# Altium PCB Voltage_Current.PcbDoc
Units mil, origin at the board's own origin, x right, y up, seen from the top; angles counter-clockwise.
Board outline 3475 x 2550 mil, 2 copper layers (Top Layer, Bottom Layer); 54 components, 46 nets, 228 pads, 37 vias.
Unrouted connection lines stored in the file: 2.
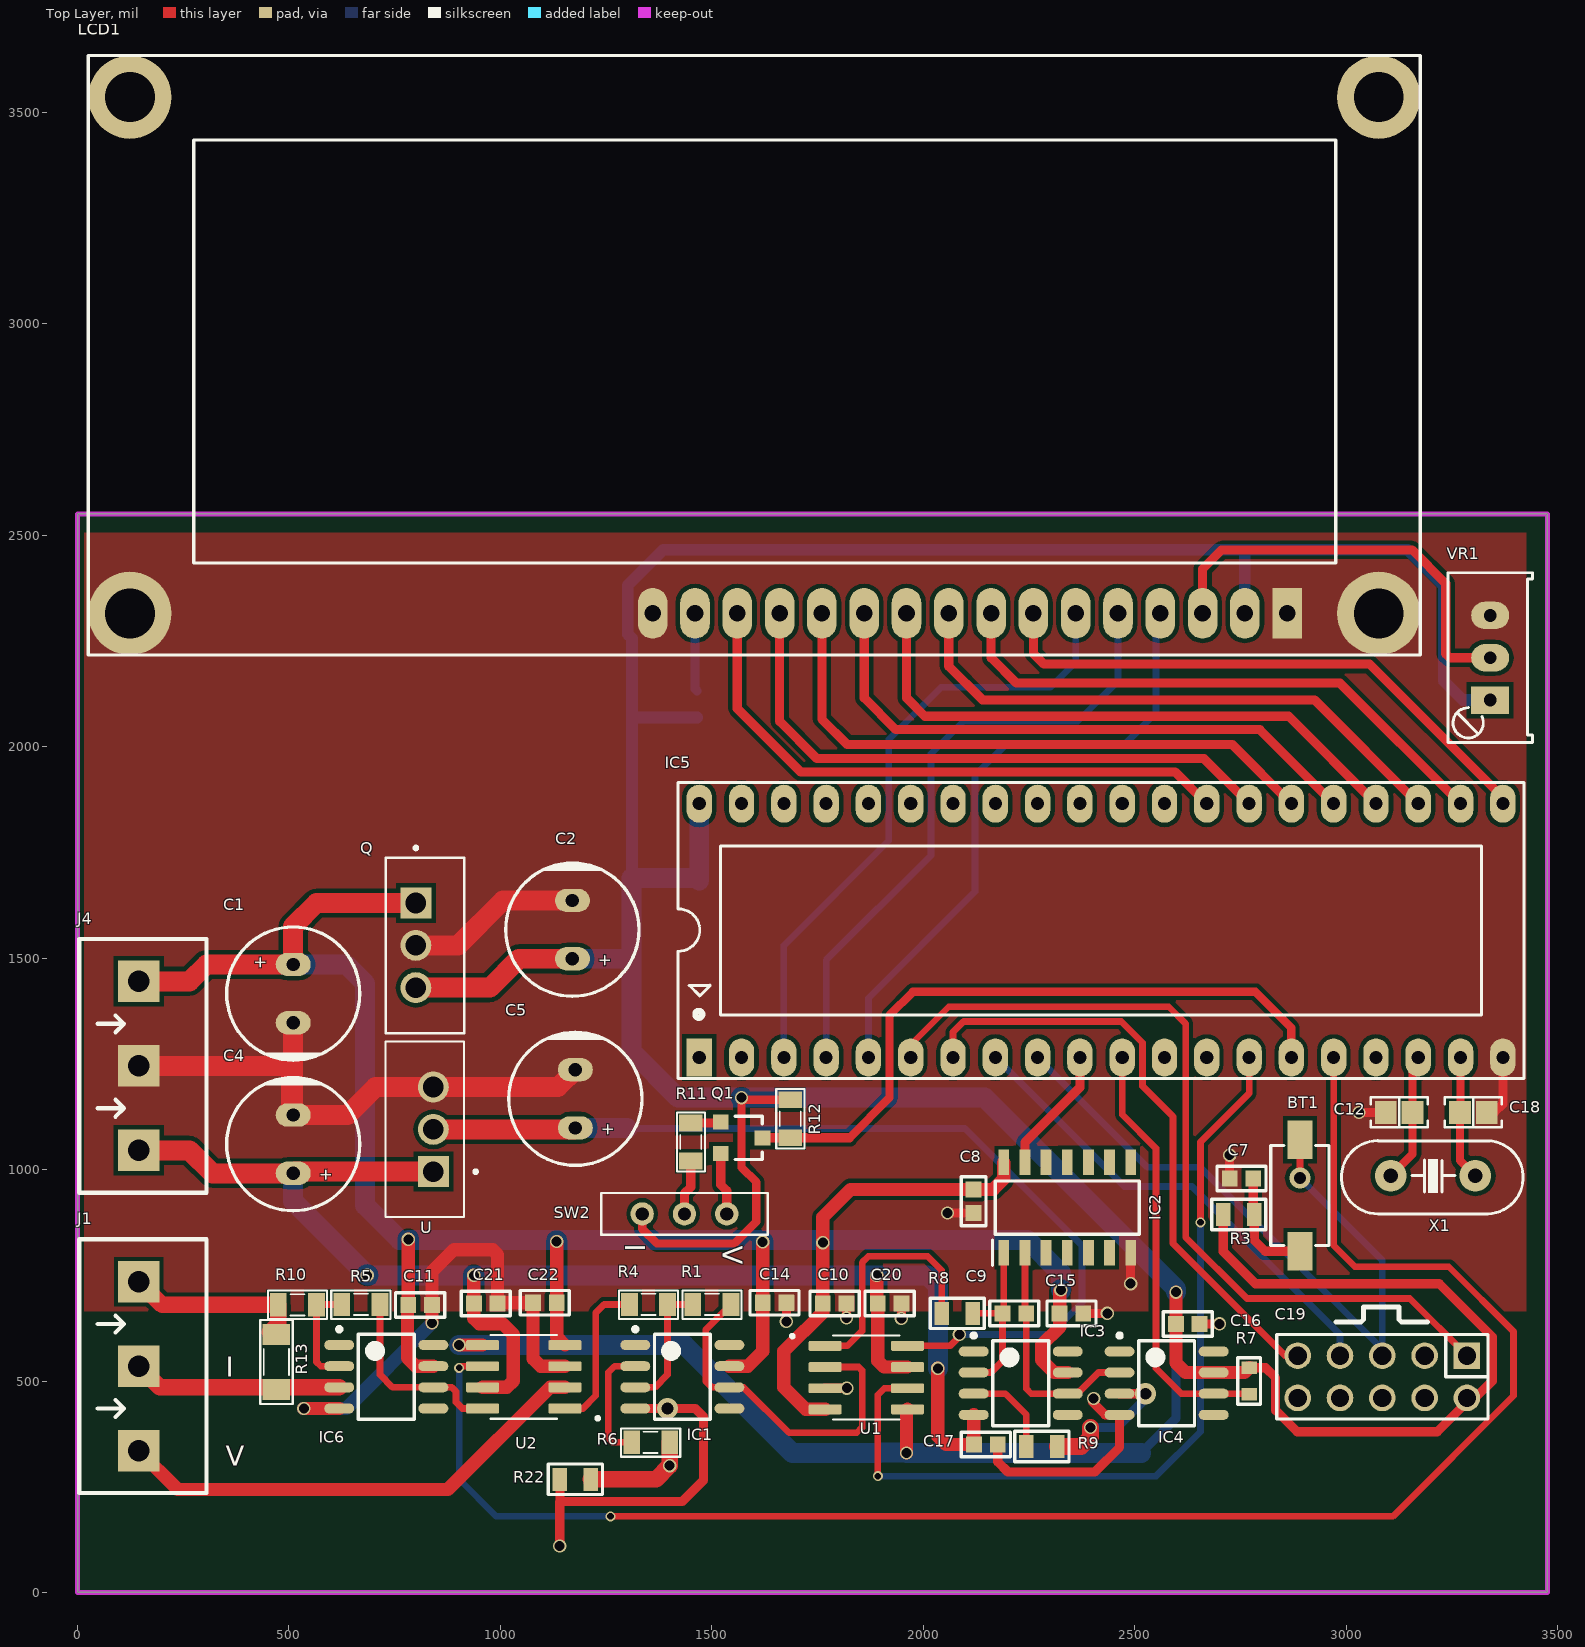
[diagram p0: Top Layer view]
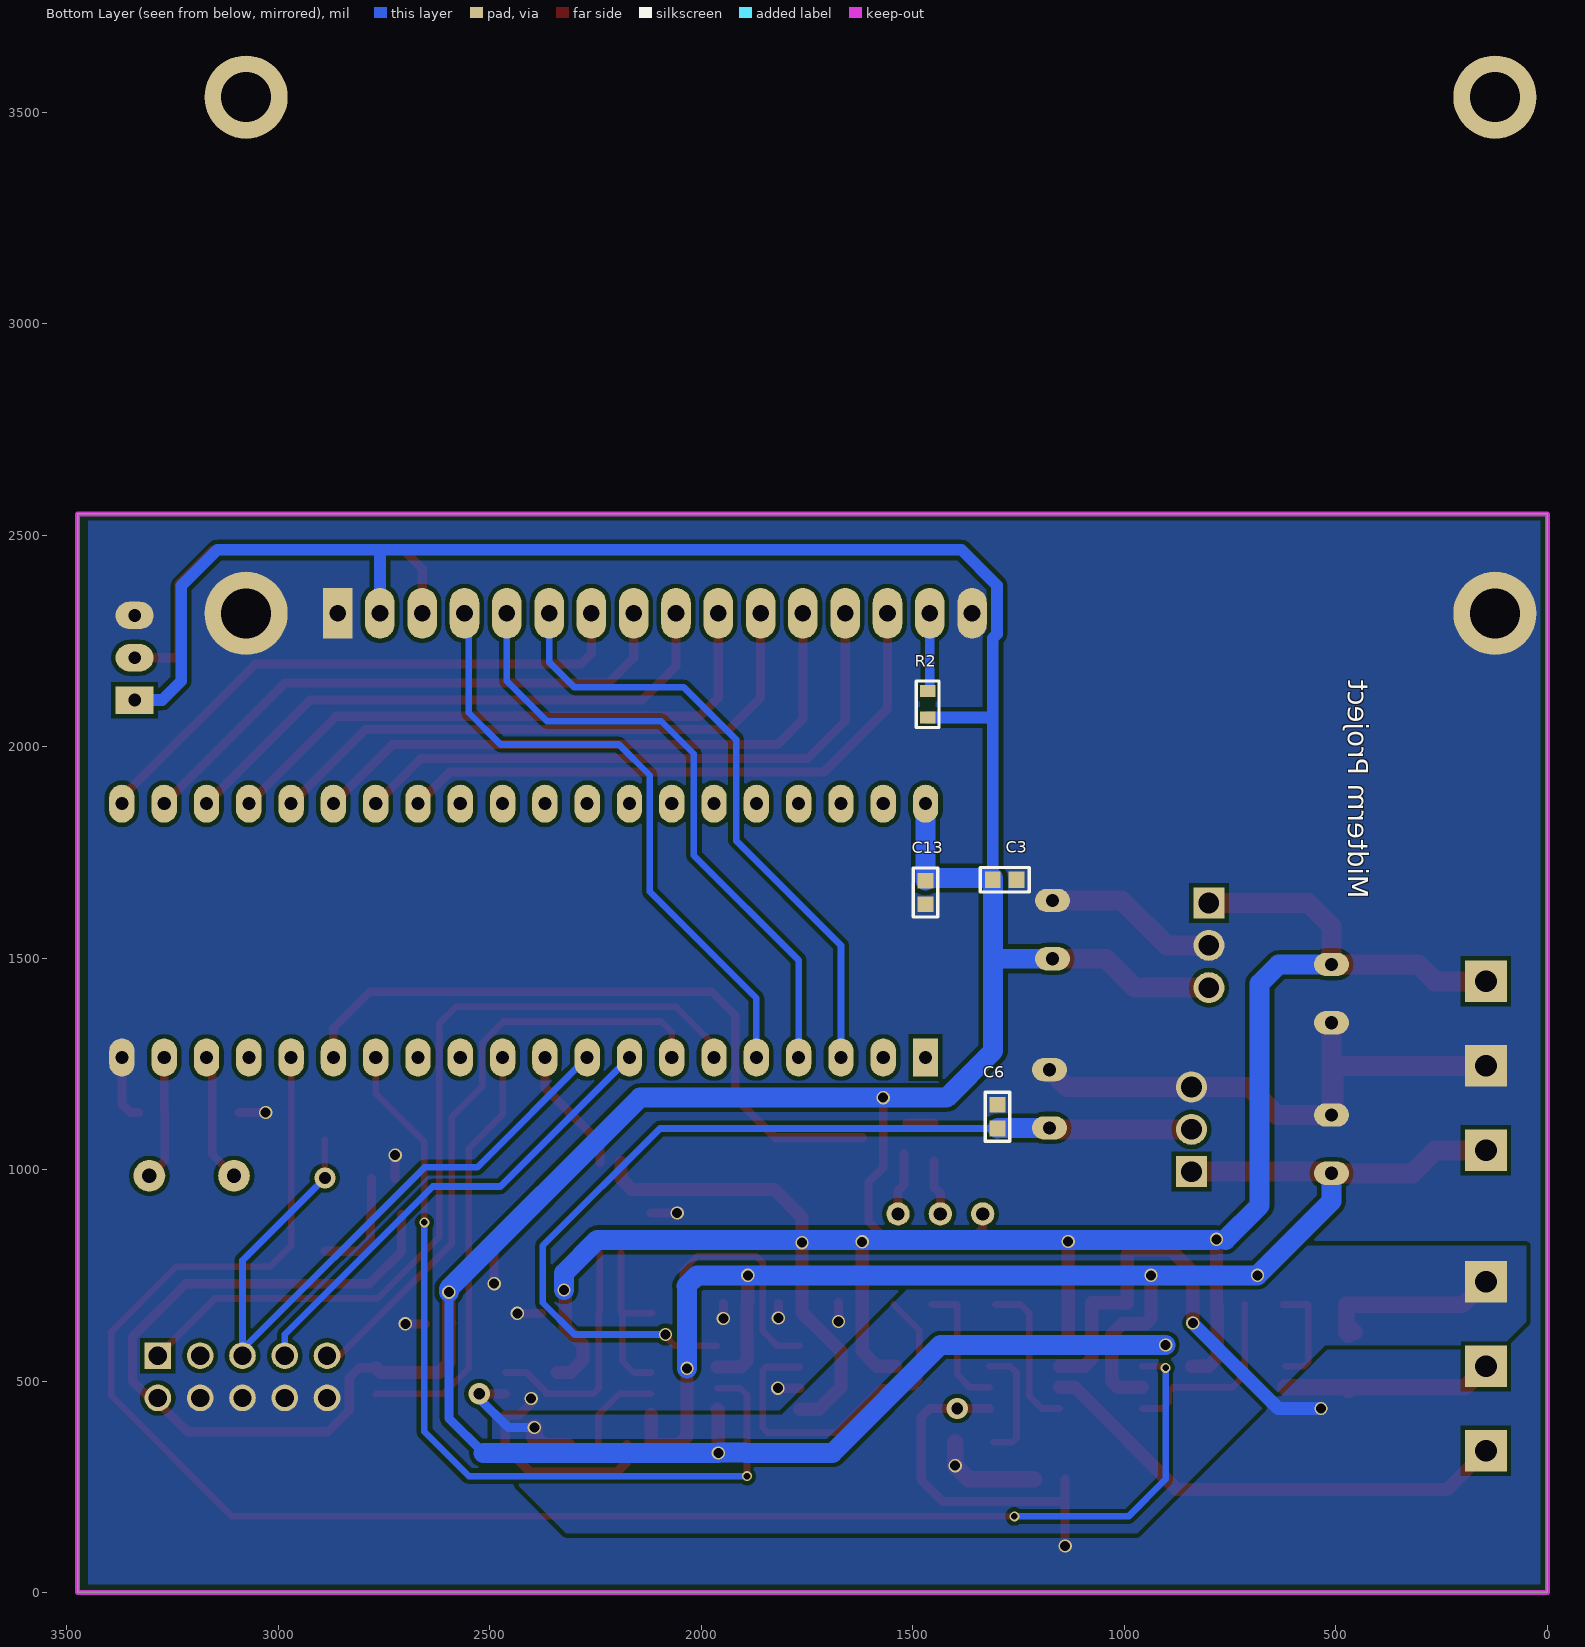
[diagram p1: Bottom Layer view, seen from below]
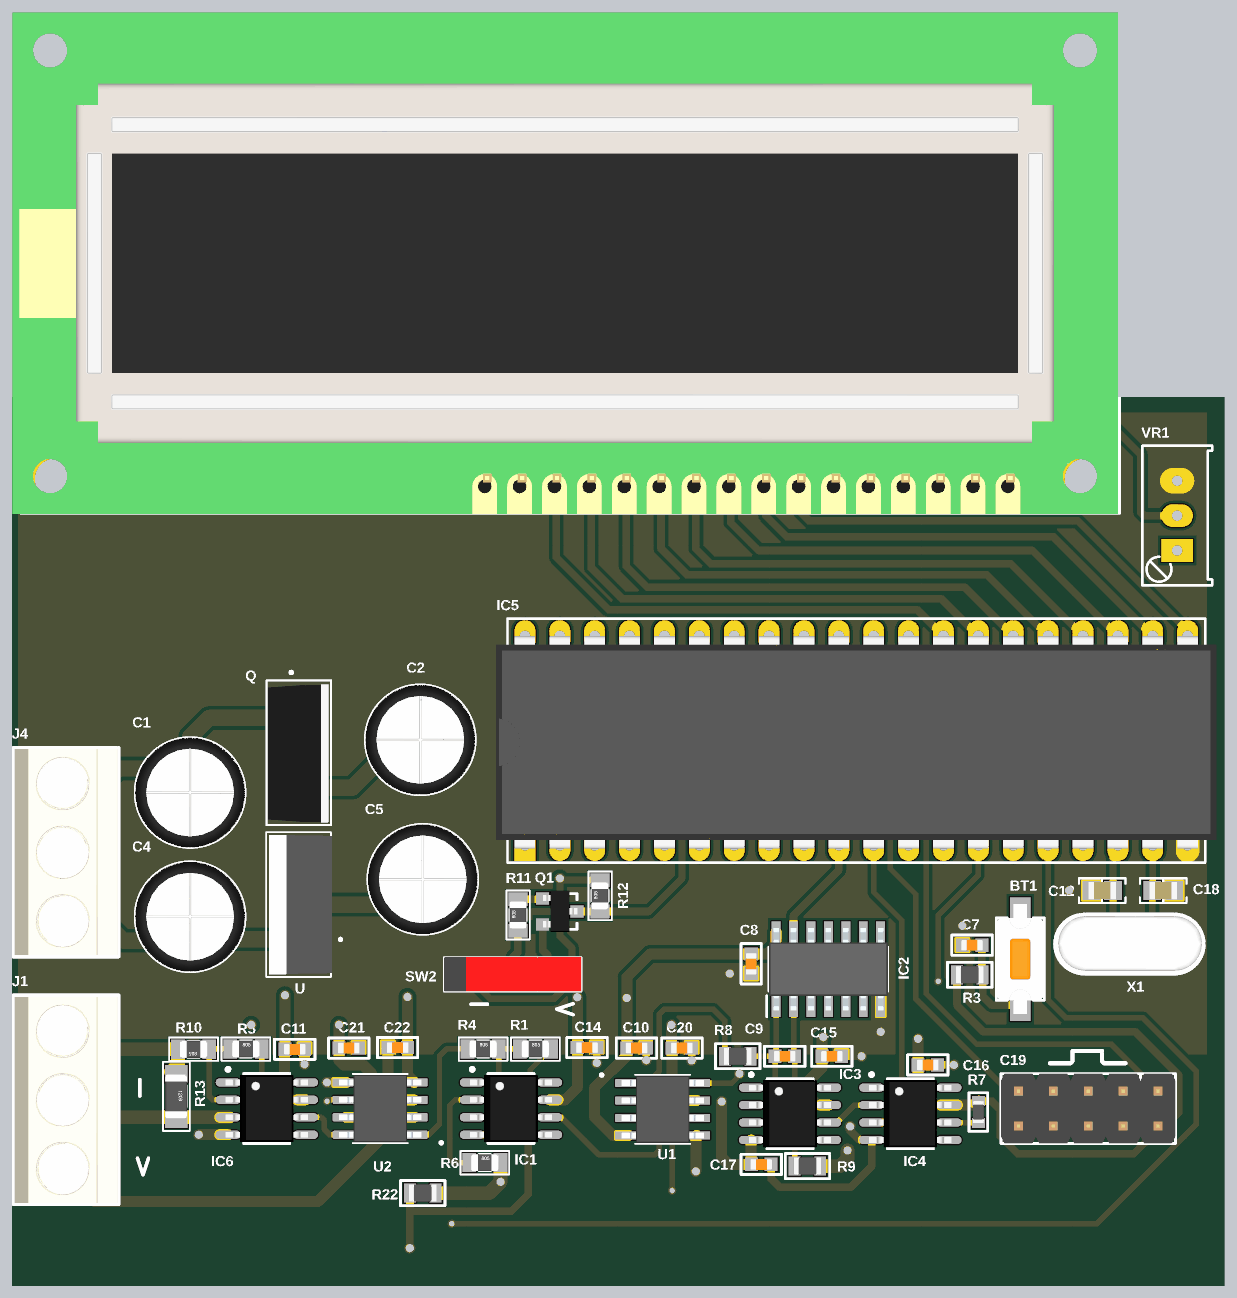
[diagram p2: 3D render of the assembled board from above, using the file's embedded part models]
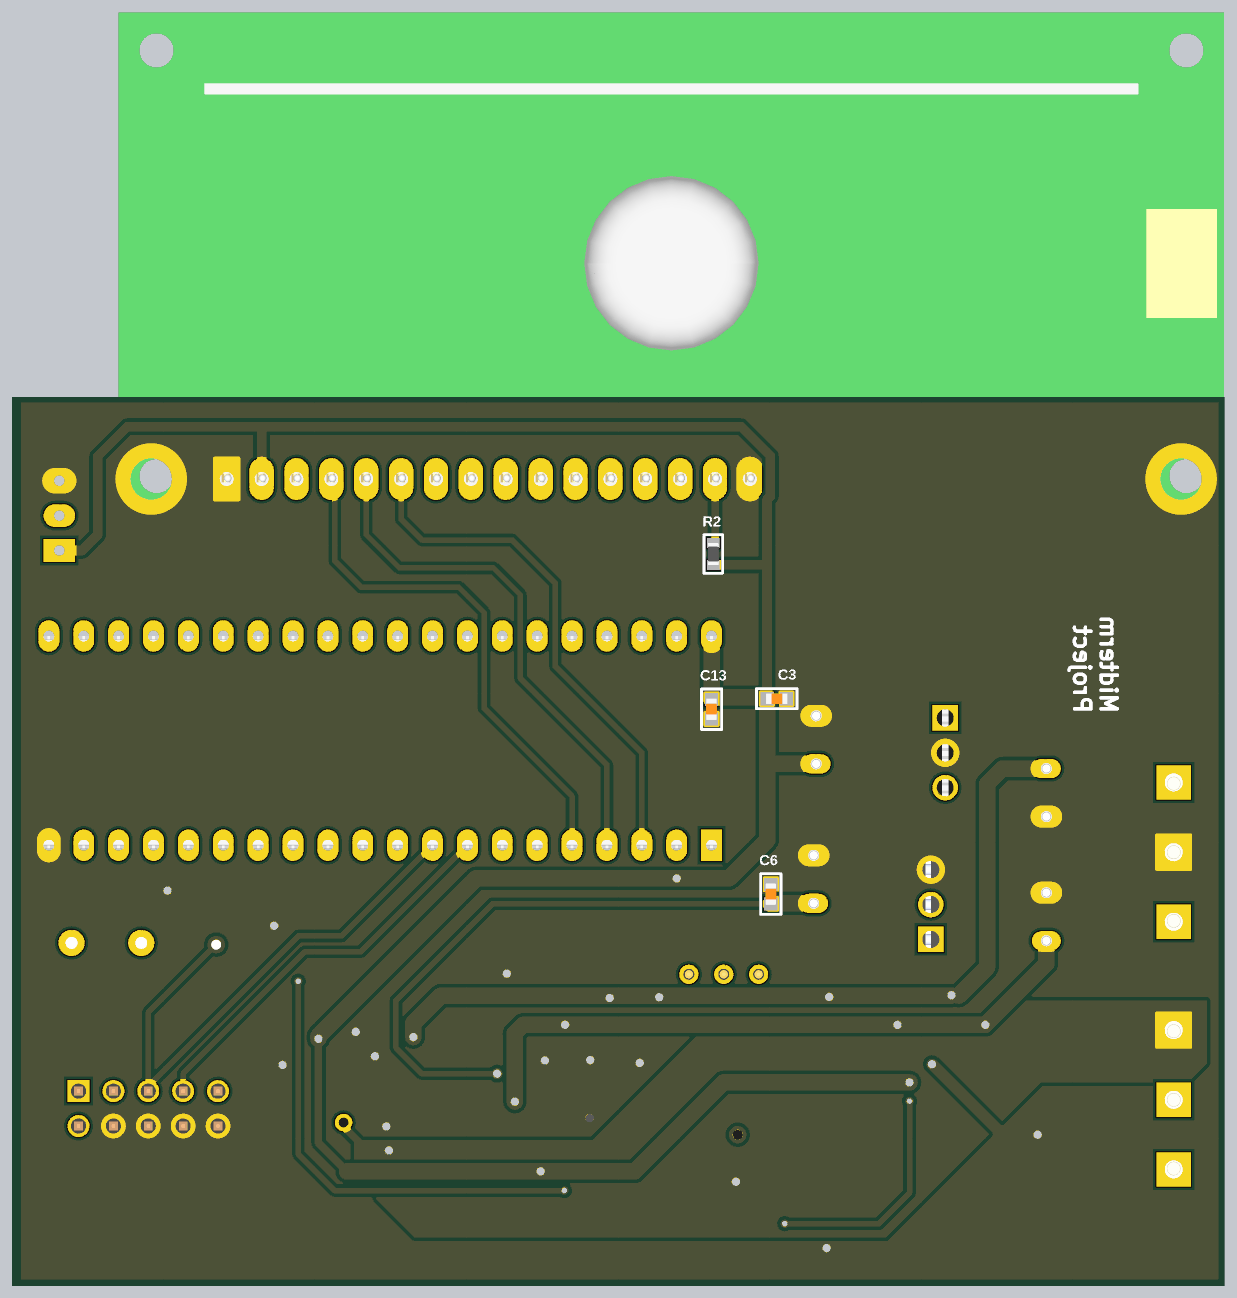
[diagram p3: 3D render of the assembled board from below, using the file's embedded part models]

## Layer stack, top to bottom
Top Solder: solder mask 0.4, Solder Resist, Dk 3.5
Top Layer: signal copper 1.4
Dielectric 1: dielectric 12.6, FR-4, Dk 4.8
Bottom Layer: signal copper 1.4
Bottom Solder: solder mask 0.4, Solder Resist, Dk 3.5

## Board outline
0,0 3475,0 3475,2550 0,2550

## Design rules (kind name [scope] priority, off if disabled: settings)
Clearance [All] p1: gap=10 ignorepadtopadclearanceinfootprint=FALSE except(0: Arc-Hole Track-Hole SMDPad-Hole THPad-Hole Via-Hole Fill-Hole Poly-Hole Region-Hole Text-Hole)
PlaneConnect [All] p1: planeconnectstyle=Direct reliefexpansion=20 reliefentries=4 reliefconductorwidth=10 reliefairgap=10
PolygonConnect [All] p1: connectstyle=Direct reliefconductorwidth=10 reliefentries=4 polygonreliefangle="90 Angle" airgapwidth=10
RoutingVias PowerVIas [InNetClass('POWER')] p1: holewidth=23.62 width=31.5 viastyle="Through Hole" minholewidth=23.62 minwidth=31.5 maxholewidth=23.62 maxwidth=31.5
RoutingVias [InNetClass('Power')] p2: holewidth=15.75 width=23.62 viastyle="Through Hole" minholewidth=15.75 minwidth=23.62 maxholewidth=15.75 maxwidth=23.62
SolderMaskExpansion [All] p1: expansion=4
Width Width_1 [InNetClass('Power')] p1: maxlimit=47.24 minlimit=11.81 preferedwidth=39.37
Width [All] p2: maxlimit=21.65 minlimit=13.78 preferedwidth=15.75
29 further rules are at their usual default settings.

## Components (designator, comment, footprint, x,y, rotation, side; value= is the part's Value field where it differs from the comment)
BT1 "Button 2" 4341x10438x6_6x3.5x4.3 2890,938.54 r270 top
C1 "100µF" "CAP TH ALUM ELEC D8.00mm S3.50mm H12.50mm" 510,1416.05 r90 top
C2 "100µF" "CAP TH ALUM ELEC D8.00mm S3.50mm H12.50mm" 1170,1567.27 r270 top
C3 "0.1uF - 50V" CAPC_0603_N 1282.95,1685 r0 bottom
C4 "100µF" "CAP TH ALUM ELEC D8.00mm S3.50mm H12.50mm" 510,1060 r270 top
C5 "100µF" "CAP TH ALUM ELEC D8.00mm S3.50mm H12.50mm" 1177.05,1167.27 r270 top
C6 "0.1uF - 50V" CAPC_0603_N 1300,1125 r270 bottom
C7 "0.1uF - 50V" CAPC_0603_N 2752,978.54 r0 top
C8 "0.1uF - 50V" CAPC_0603_N 2118.78,925 r270 top
C9 "10nF - 50V" CAPC_0603_N 2215,660 r0 top
C10 "0.1nF - 50V" CAPC_0603_N 1790,683.56 r0 top
C11 "0.1uF - 50V" CAPC_0603_N 810,680 r0 top
C12 "33pF" "CAP 0805_2012" 3125,1135 r0 top
C13 "0.1uF - 50V" CAPC_0603_N 1470,1655 r270 bottom
C14 "0.1uF - 50V" CAPC_0603_N 1647.95,685 r0 top
C15 "0.1nF - 50V" CAPC_0603_N 2350,660 r0 top
C16 "0.1nF - 50V" CAPC_0603_N 2625,635 r0 top
C17 "0.1uF - 50V" CAPC_0603_N 2147.78,350 r0 top
C18 "33pF" "CAP 0805_2012" 3300,1135 r180 top
C19 "JP5x2" JP5-D2T 3085,510 r180 top
C20 "0.1uF - 50V" CAPC_0603_N 1920,683.56 r0 top
C21 "0.1uF - 50V" CAPC_0603_N 965,683.56 r0 top
C22 "0.1nF - 50V" CAPC_0603_N 1105,685 r180 top
IC1 "LM741" SO8 1430,510 r0 top
IC2 "CD74HC4066M96" SOIC127P600X175-14N 2340,910 r90 top
IC3 "LM741" SO8 2230,495 r0 top
IC4 "LM741" SO8 2575,495 r0 top
IC5 "AT89C52" DIP40/W0.6 1470,1265 r0 top
IC6 "LM741" SO8 730,510 r0 top
J1 "KF3" KF3-5.08 145,735 r270 top
J4 "KF3" KF3-5.08 145,1445 r270 top
LCD1 "LCD 16x2A" LCD16X2 2860,2315 r180 top value=LCD16x2A
Q "LM7805CT/NOPB" TO254P1054X470X2600-3 800,1630 r270 top
Q1 "2N222" SOT23-231 1570,1075 r270 top value=C1815
R1 "82k" RES-SMD-0805 1500,681 r0 top
R2 "330R" RESC_0603_N 1465,2100 r90 bottom
R3 "100K" RESC_0805_N 2745.39,893.54 r0 top
R4 "20.5k" RES-SMD-0805 1350,681 r0 top
R5 "10k" RES-SMD-0805 670,681 r0 top
R6 "16k" RES-SMD-0805 1355,355 r0 top
R7 "10K" RESC_0603_N 2770,500 r270 top
R8 "100K" RESC_0805_N 2080,660 r180 top
R9 "100K" RESC_0805_N 2280.04,345 r0 top
R10 "10k" RES-SMD-0805 520,680 r180 top
R11 "1k" RES-SMD-0805 1450,1065 r90 top
R12 "1k" RES-SMD-0805 1685,1120 r90 top
R13 "0.5R" RES-SMD-1206 470,545 r270 top
R22 "0R" RESC_0805_N 1177.05,267.6 r0 top
SW2 "SW 1-2" 450301014042 1435,895 r180 top
U "LM7905CT/NOPB" TO254P1054X470X1955-3 841.22,1095 r90 top
U1 "DG419DY" SOIC127P600X175-8N 1865,507.99 r0 top
U2 "DG419DY" SOIC127P600X175-8N 1055,510 r180 top
VR1 "POT SINGLE" "POTSD 3296V" 3340,2110 r90 top
X1 "12Mhz" XT2 3205,985 r180 top value=4Mhz

## Footprints (in the part's own frame and the unit in brackets; to place one, negate y for a bottom-side part, rotate by r counter-clockwise, add the part's x,y. Pads: shape width x height; smd on the part's side, far side on the other; paste and mask are expansions set on the pad)
4341x10438x6_6x3.5x4.3 [mm] "6.0x3.5mm Tact Switch SMD version"
  rect 2.3x1.5 smd: 1(-3.35,0) 2(3.35,0)
  silkscreen extent -3,-1.75 3,1.75, body extent -4,-1.75 4,1.75, height 4.32
450301014042 [mm] "10mm*2.5mm. SPDT, ON-ON, 2.54mm, horizontal type, THT, bulk"
  round 1.4 hole 0.8: 1(-2.54,0) 2(0,0) 3(2.54,0)
  silkscreen extent -5,-1.25 5,1.25, body extent -5,-1.25 5,1.25, height 6.4
"CAP 0805_2012" [mm] "Chip Capacitor, 2-Leads, Body 2.00x1.20mm, IPC Medium Density"
  rect 1.3x1.4 smd: 1(-0.8,0) 2(0.8,0)
  silkscreen extent -1.7,-0.9 1.7,0.9, body extent -1,-0.64 1,0.64, height 1.26
"CAP TH ALUM ELEC D8.00mm S3.50mm H12.50mm" [mm] "8mm Diameter 3.5mm Lead Spacing Aluminum Electrolytic Capacitors Radial, Can"
  oval 1.4x2.1 hole 0.8: 1(1.75,0) 2(-1.75,0)
  silkscreen extent -4,-4 4,4, body extent -4.01,-4 4,4, height 12.5
CAPC_0603_N [mm]
  rrect2% 0.95x0.97 smd: 1(-0.71,0) 2(0.71,0)
  silkscreen extent -1.47,-0.74 1.47,0.74, body extent -0.8,-0.4 0.8,0.4, height 0.8
DIP40/W0.6 [mil] "40 PIN, W 600mil, Pin to pin 100mil"
  rect 60x90 hole 31: 1(0,0)
  oval 60x90 hole 31: 2(100,0) 3(200,0) 4(300,0) 5(400,0) 6(500,0) 7(600,0) 8(700,0) 9(800,0) 10(900,0) 11(1000,0) 12(1100,0) 13(1200,0) 14(1300,0) 15(1400,0) 16(1500,0) 17(1600,0) 18(1700,0) 19(1800,0) 20(1900,0) 21(1900,600) 22(1800,600) 23(1700,600) 24(1600,600) 25(1500,600) 26(1400,600) 27(1300,600) 28(1200,600) 29(1100,600) 30(1000,600) 31(900,600) 32(800,600) 33(700,600) 34(600,600) 35(500,600) 36(400,600) 37(300,600) 38(200,600) 39(100,600) 40(0,600)
  silkscreen extent -50,-50 1950,650, body extent -82,-10 1982,600, height 224
JP5-D2T [mm] "10 pins, dual pin, straight, gold plating"
  rect 1.6x1.6 hole 1.1: 1(-5.08,-1.27)
  round 1.6 hole 1.1: 2(-2.54,-1.27) 3(0,-1.27) 4(2.54,-1.27) 5(5.08,-1.27) 6(5.08,1.27) 7(2.54,1.27) 8(0,1.27) 9(-2.54,1.27) 10(-5.08,1.27)
  silkscreen extent -6.35,-2.54 6.35,2.54, body extent -6.35,-2.54 6.35,2.54, height 8.55
KF3-5.08 [mm]
  rect 2.5x2.5 hole 1.3: 1(0,0) 2(5.08,0) 3(10.147,0)
  silkscreen extent -2.54,-3.58 12.7,4.06, body extent -2.42,-3.51 12.58,3.99, height 10
LCD16X2 [mm] "LCD dipslay 16x2, 16 pin"
  round 5 hole 3: 1(-5.5,0) 1(-5.5,-31) 1(69.5,-31) 1(69.5,0)
  rect 1.778x3.048 hole 1: 1(0,0)
  oval 1.778x3.048 hole 1: 2(2.54,0) 3(5.08,0) 4(7.62,0) 5(10.16,0) 6(12.7,0) 7(15.24,0) 8(17.78,0) 9(20.32,0) 10(22.86,0) 11(25.4,0) 12(27.94,0) 13(30.48,0) 14(33.02,0) 15(35.56,0) 16(38.1,0)
  round 0 all layers, no hole: ""(-5.5,0)
  silkscreen extent -8,-33.5 72,2.5, body extent -7.87,-33.96 72.64,2.54, height 18.14
"POTSD 3296V" [mil] "Variable Resistor"
  rect 65x90 hole 30: 1(0,0)
  oval 65x90 hole 30: 2(100,0) 3(200,0)
  silkscreen extent -100,-100 301,100, body extent -91,-98 291,90, height 430
RES-SMD-0805 [mil]
  rect 39.37x55 smd: 1(-45,0) 2(45,0)
  silkscreen extent -70,-34 70,33, body extent -39,-25 39,25, height 31
RES-SMD-1206 [mil]
  rect 50x65 smd: 1(-65,0) 2(65,0)
  silkscreen extent -99,-38 99,39, body extent -63,-31 63,32, height 40
RESC_0603_N [mm]
  rrect3% 0.74x0.93 smd: 1(-0.795,0) 2(0.795,0)
  Top Layer pour cut-out: -0.432,0.457 0.432,0.457 0.432,-0.457 -0.432,-0.457
  silkscreen extent -1.4,-0.69 1.4,0.69, body extent -0.8,-0.4 0.8,0.4, height 0.55
RESC_0805_N [mm]
  rrect2% 0.87x1.38 smd: 1(-0.93,0) 2(0.93,0)
  silkscreen extent -1.63,-0.91 1.63,0.91, body extent -1,-0.62 1,0.63, height 0.6
SO8 [mm] "SOIC, 8-Leads, Body 4.9x3.9mm, Pitch 1.27mm, IPC High Density"
  oval 1.8x0.6 smd: 1(-2.825,1.905) 2(-2.825,0.635) 3(-2.825,-0.635) 4(-2.825,-1.905) 5(2.825,-1.905) 6(2.825,-0.635) 7(2.825,0.635) 8(2.825,1.905)
  silkscreen extent -2.95,-2.55 1.68,2.98, body extent -2.99,-2.45 3,2.45, height 1.6
SOIC127P600X175-8N [mm]
  rrect25% 1.97x0.59 smd: 1(-2.475,1.905) 2(-2.475,0.635) 3(-2.475,-0.635) 4(-2.475,-1.905) 5(2.475,-1.905) 6(2.475,-0.635) 7(2.475,0.635) 8(2.475,1.905)
  silkscreen extent -4.54,-2.52 2,2.59, body extent -3,-2.45 3,2.45, height 1.75
SOIC127P600X175-14N [mm]
  rect 1.525x0.65 smd: 1(-2.712,3.81) 2(-2.712,2.54) 3(-2.712,1.27) 4(-2.712,0) 5(-2.712,-1.27) 6(-2.712,-2.54) 7(-2.712,-3.81) 8(2.712,-3.81) 9(2.712,-2.54) 10(2.712,-1.27) 11(2.712,0) 12(2.712,1.27) 13(2.712,2.54) 14(2.712,3.81)
  silkscreen extent -3.47,-4.33 1.6,4.48, body extent -3,-4.32 3,4.32, height 1.75
SOT23-231 [mm]
  rect 0.9x0.95 smd mask+0: 1(0.95,-1.25)
  rect 0.9x0.95 smd: 2(-0.95,-1.25) 3(0,1.25)
  silkscreen extent -1.3,-0.38 1.3,1.25, body extent -1.52,-1.23 1.48,1.27, height 1.06
TO254P1054X470X1955-3 [mm]
  rect 1.86x1.86 hole 1.24: 1(-2.54,0)
  round 1.86 hole 1.24: 2(0,0) 3(2.54,0)
  silkscreen extent -5.27,-2.64 5.27,2.86, body extent -5.08,-1.9 5.08,2.67, height 19.56
TO254P1054X470X2600-3 [mm]
  rect 1.86x1.86 hole 1.24: 1(0,0)
  round 1.86 hole 1.24: 2(2.54,0) 3(5.08,0)
  silkscreen extent -3.41,-1.8 7.81,2.9, body extent -2.44,-1.71 7.62,2.73, height 18.5
XT2 [mil] "Footpin for Crystal 2 pin"
  round 75 hole 34: 1(-100,0) 2(100,0)
  silkscreen extent -213,-83 217,90, body extent -216,-87 216,90, height 144

## Part data
BT1: "Button 2 Pin no Sheld"
C1 C2 C4 C5: library part ECA-1HM101, "CAP ALUM 100UF 20% 50V RADIAL", Device Package="Radial, Can", Lifetime @ Temp.="2000 Hrs @ 85°C", Manufacturer="Panasonic Electronic Components", Operating Temperature="-40°C ~ 85°C", Ripple Current @ High Frequency="425mA @ 10kHz", Ripple Current @ Low Frequency="250mA @ 120Hz", Supplier Part Number 1=P5182-ND, Tolerance=±20%, Voltage - Rated=50V, Applications="General Purpose", Capacitance=100µF, ComponentLink1Description=Datasheet, ComponentLink1URL=//media.digikey.com/pdf/Data%20Sheets/Panasonic%20Electronic%20Components/ECA-xxM%20Series,TypeA.pdf, ComponentLink2Description="DigiKey Link", ComponentLink2URL=http://digikey.com/product-detail/en/panasonic-electronic-components/ECA-1HM101/P5182-ND/245041, Height - Seated (Max)="0.492\" (12.50mm)", LastUpdated="9/7/2020 5:24:52 AM", Lead Spacing="0.138\" (3.50mm)", Lifecycle Status=Active, Minimum Order=1, Mounting Type="Through Hole", Package / Case="Radial, Can", Packaging=Bulk, PartId=7199, Part Number=ECA-1HM101, Part Status=Active, Polarization=Polar, Price=0.31, Series=M, Size / Dimension="0.315\" Dia (8.00mm)", Supplier 1=DigiKey
C3 C6 C7 C8 C11 C13 C14: library part C0603X7R104K500NT, "CAP CER 0.1UF 50V X7R 0603", Detailed Value="0.1uF - 50V - 0603", Manufacture=Hottech, Category=Capacitor, Creator=ThangND, Mounting Type=SMD, Partnumber=C0603X7R104K500NT, PROJECT=KHO
C9: library part C0603X7R103J500NT, "CAP CER 10000PF 50V X7R 0603", Detailed Value="10nF - 50V - 0603", Manufacture=Hottech, Category=Capacitor, Creator=ThangND, Mounting Type=SMD, Partnumber=C0603X7R103J500NT, PROJECT=KHO
C10 C15 C16 C22: library part CL10B101KB8NNNC, "CAP CER 100PF 50V X7R 0603", Detailed Value="0.1nF - 50V - 0603", Manufacture="Samsung Electro-Mechanics", Category=Capacitor, Creator=ThangND, Mounting Type=SMD, Partnumber=CL10B101KB8NNNC, PROJECT=KHO
C12 C18: library part CBR08C330JAGAC, "CAP CER 33PF 250V C0G/NP0 0805", Device Package="0805 (2012 Metric)", Manufacturer=KEMET, Operating Temperature="-55°C ~ 125°C", Supplier Part Number 1=399-6202-1-ND, Temperature Coefficient="C0G, NP0", Tolerance=±5%, Voltage - Rated=250V, Applications="RF, Microwave, High Frequency", Capacitance=33pF, ComponentLink1Description=Datasheet, ComponentLink1URL=https://api.kemet.com/component-edge/download/datasheet/CBR08C330JAGAC.pdf, ComponentLink2Description="DigiKey Link", ComponentLink2URL=http://digikey.com/product-detail/en/kemet/CBR08C330JAGAC/399-6202-1-ND/2732182, Features="High Q, Low Loss, Ultra Low ESR", LastUpdated="9/2/2020 1:04:42 AM", Lifecycle Status=Active, Minimum Order=1, Mounting Type="Surface Mount, MLCC", Package / Case="0805 (2012 Metric)", Packaging=TapeAndReel, PartId=2409, Part Number=CBR08C330JAGAC, Part Status=Active, Price=0.44, Series="CBR-SMD RF C0G", Size / Dimension="0.079\" L x 0.049\" W (2.00mm x 1.25mm)", Supplier 1=DigiKey, Thickness (Max)="0.035\" (0.88mm)"
C17 C20 C21: library part CL10B104KB8NNNC, "CAP CER 0.1UF 50V X7R 0603", Detailed Value="0.1uF - 50V - 0603", Manufacture="Samsung Electro-Mechanics", Category=Capacitor, Creator=ThangND, Mounting Type=SMD, Partnumber=CL10B104KB8NNNC, PROJECT=KHO
C19: "WR-PHD 2.54 mm Dual Socket Header", Manufacturer="W¨¹rth Elektronik eiSos GmbH", partNo=61301021821, ComponentLink1 Description=Manufacturer, ComponentLink1URL=http://www.we-online.com, ComponentLink2 Description=Datasheet, ComponentLink2URL=http://katalog.we-online.de/em/datasheet/6130xx21821.pdf, Created by="Karrer Zheng", Created Date="29 March 2013", NoPins=10
IC1 IC3 IC4 IC6: "Single OA"
IC2: "Integrated Circuit", Manufacturer_Name="Texas Instruments", Mouser Part Number=595-CD74HC4066M96, Arrow Part Number=CD74HC4066M96, Arrow Price/Stock=https://www.arrow.com/en/products/cd74hc4066m96/texas-instruments, Datasheet Link=http://www.ti.com/lit/gpn/cd74hc4066, Height=1.75mm, Manufacturer_Part_Number=CD74HC4066M96, Mouser Price/Stock=https://www.mouser.co.uk/ProductDetail/Texas-Instruments/CD74HC4066M96?qs=3pnr37ZAbK%2F2%2FQ8j7WB7Tw%3D%3D
IC5: "Atmel AT89C52, 8k Byte Flash Memory , 40 Pin"
J1 J4: Manufacturer="Würth Elektronik eiSos GmbH", partNo=691103110003, ComponentLink1 Description=Manufacturer, ComponentLink1URL=http://www.we-online.com, ComponentLink2 Description=Datasheet, ComponentLink2URL=http://katalog.we-online.de/em/datasheet/6911031100xx.pdf, Created by="Karrer Zheng", Created Date="29 October 2013", NoPins=3
LCD1: library part LCD16x2A, "LCD dipslay 16 char, 2 line"
Q: "Linear Voltage Regulator IC 1 Output 1A TO-220-3", Package="TO-220 ON Semiconductor", Availability=Unavailable, MF="ON Semiconductor", MP=LM7805CT, Price=None, SnapEDA_Link=https://www.snapeda.com/parts/LM7805CT/ON%20Semiconductor/view-part/546231/?ref=snap
Q1: "NPN 600mW, ECB", =C2383
R1 R4 R5 R6 R10 R11 R12 R13: library part Res-SMD, "Resistor", Manufacturer="Generic Components", Class=Passive, Published=08/06/2000, Publisher="Altium Hobart Technology Centre"
R2: library part RI0603L3300FT, "RES SMD 330 OHM 1% 1/10W 0603", Detailed Value="330R - 1% - 1/10W", Manufacture=Hottech, Category=Resistor, Creator=anhdn, Mounting Type=SMD, Partnumber=RI0603L3300FT, PROJECT=KHO
R3 R8 R9: library part RC0805JR-07100KL, "RES SMD 100K OHM 5% 1/8W 0805", Detailed Value=100K-5%-1/8W, Manufacture=Yageo, Category=Resistor, Creator=Tunn, Mounting Type=SMD, Partnumber=RC0805JR-07100KL, PROJECT="NEED PURCHASE", Supplier=Digikey
R7: library part RI0603L1002FT, "RES SMD 10K OHM 1% 1/10W 0603", Detailed Value="10K - 1% - 1/10W", Manufacture=Hottech, Category=Resistor, Creator=anhdn, Mounting Type=SMD, Partnumber=RI0603L1002FT, PROJECT=KHO
R22: library part RC0805JR-070RL, "RES SMD 0 OHM JUMPER 1/8W 0805", Detailed Value="0 OHM - 1/8W", Manufacture=Yageo, Category=Resistor, Creator=anhdn, Mounting Type=SMD, Partnumber=RC0805JR-070RL, PROJECT=KHO
SW2: "Switch 1-2 Pin"
U: "1.5-A, negative linear voltage regulator 3-TO-220 0 to 125", Package="TO-220-3 Texas Instruments", Availability=Unavailable, DigiKey-Purchase-URL=https://snapeda.com/shop?store=DigiKey&id=6864, MF="Texas Instruments", Mouser-Purchase-URL=https://snapeda.com/shop?store=Mouser&id=6864, MP=LM7905CT/NOPB, Price=None, SnapEDA_Link=https://www.snapeda.com/parts/LM7905CT/NOPB/Texas%20Instruments/view-part/6864/?ref=snap, Texas_Instruments-Purchase-URL=https://snapeda.com/shop?store=Texas+Instruments&id=6864
U1 U2: Package=None, Availability=Unavailable, MP=DG419DY, Price=None
VR1: "Var Resistor"
X1: library part XT2, "Crystal, 32.768 KHz, -40 to 85 degC, 3.2 x 1.5 x 0.9 mm SMD"

## Via types
v1: diameter 31.5, hole 23.62, Top Layer to Bottom Layer, tented both sides, 30 vias
v2: diameter 23.62, hole 15.75, Top Layer to Bottom Layer, tented both sides, 4 vias
v3: diameter 50, hole 28, Top Layer to Bottom Layer, tented both sides, 2 vias
v4: diameter 50, hole 28, Top Layer to Bottom Layer, 1 vias

## Nets (pads, with @x,y where several pads share a name; then routed paths per layer and width w, separated by ;. In a path a pad name is that pad's centre, name@x,y a point inside that pad or via, vN(x,y) a via of type N, cw(c..) or ccw(c..) an arc to the next point about the centre after c; other vN are vias at no path point)
5V: C2.1 C3.2 C13.1 C16.1 C19.10 IC4.7 IC5.40 LCD1.2 Q.3 R2.1 R3.1 R7.1 R12.2 SW2.3 U1.5 U2.5 VR1.1 | length 11242.1
  Top Layer w19.68: SW2.3 1335,860 1370,825 1553.35,825 1605,876.65 1605,970 1570,1005 v1(1570,1170) 1575,1165 R12.2
  Top Layer w21.65: R3.1 2708.77,806.23 2785,730 3219.41,730 3345,604.41 3345,500 3305,460 C19.10 3285,450 3215,380 2883.68,380 2832.68,431 2832.68,507.32 2808.7,531.3 R7.1
  Top Layer w31.5: v1(902.4,585) U2.5 ; v1(1960,330) 1960,430.55 U1.5 ; v1(2597.05,710) 2597.05,639.09 2595,637.05 C16.1 2597.05,542.95 2620,520 IC4.7 2758.7,520 R7.1
  Top Layer w47.24: Q.3 975.06,1430 1043.43,1498.38 C2.1
  Bottom Layer w21.65: 2515,330 2597.05,412.05 v1(2597.05,710)
  Bottom Layer w27.56: C3.2 1310.91,1689.09 1310.91,2068.7 ; R2.1 1310.91,2068.7 ; LCD1.2 2760,2460 2755,2465 ; VR1.1 3275,2110 3230,2155 3230,2380 3145,2465 2755,2465 ; 1310.91,2068.7 1310.91,2255.97 1301.22,2265.65 1301.22,2381.22 1385,2465 2755,2465
  Bottom Layer w47.24: v1(902.4,585) 1435,585 1690,330 1895.75,330 1896.18,330.43 1959.57,330.43 v1(1960,330) 2515,330 ; C2.1 1308.38,1498.38 1310,1500 ; IC5.40 C13.1 1463.86,1689.09 1310.91,1689.09 1310,1689.09 1310,1500 ; v1(2597.05,710) 2597.05,717.95 2145,1170 v1(1570,1170) 1420,1170 1310,1280 1310,1500
15V: C1.1 C8.1 C10.1 C11.1 C14.1 C15.1 C22.1 IC1.7 IC2.14 IC3.7 IC6.7 J4.1 Q.1 U1.4 U2.4 | length 5505.9
  Top Layer w31.5: v1(782.05,835) C11.1 780.04,677.99 780.04,554.96 800,535 IC6.7 ; v1(1132.95,830) C22.1 1132.95,604.49 U2.4 ; IC1.7 1585,535 1620,570 C14.1 v1(1620,829.21) ; U1.4 1722.01,432.99 1670,485 1670,570.54 1719.82,620.35 1720.35,620.35 1762.05,662.05 C10.1 v1(1762.05,827.05) 1762.05,887.05 1827.95,952.95 C8.1 2165,952.95 2190,977.95 IC2.14 ; v1(2325,715) 2322.05,712.05 C15.1 2322.05,627.57 2280.04,585.56 2280.04,549.48 2309.52,520 IC3.7
  Top Layer w47.24: J4.1 265,1445 305,1485 509.94,1485 C1.1 510,1575 565,1630 Q.1
  Bottom Layer w47.24: C1.1 635.06,1484.94 680,1440 680,915 761.18,833.82 ; v1@782.05,833.82 2246.18,833.82 2325,755 v1(2325,715)
-5V: C5.1 C6.2 U1.8 U.2 | length 2243.2
  Top Layer w15.75: U1.8 2062.99,582.99 2085,605 v1(2085,610)
  Top Layer w47.24: U.2 1173.67,1095 C5.1
  Bottom Layer w15.75: C6.2 2097.95,1097.05 2375,820 2375,685 2300,610 v1(2085,610)
  Bottom Layer w47.24: C5.1 1298.67,1098.38 C6.2
-15V: C4.1 C17.1 C20.1 C21.1 IC3.4 J4.3 U1.7 U2.7 U.1 | length 3593.5
  Top Layer w31.5: v1(937.05,750) C21.1 937.05,647.95 950,635 1005,635 1030,610 1030,500 1015,485 U2.7 ; v1(1890,750) 1890,685.61 C20.1 1892.05,547.95 1907.01,532.99 U1.7 ; v1(2033.98,530) 2033.98,369.41 2053.39,350 C17.1 2118.78,351.05 IC3.4
  Top Layer w47.24: J4.3 264.5,1045.5 318.9,991.1 C4.1 513.9,995 U.1
  Bottom Layer w47.24: C4.1 510,925 v1(685,750) v1(937.05,750) v1(1890,750) 2010,750 2035,725 2033.98,723.98 v1(2033.98,530)
AGND: IC4.3 J1.1 R6.2 R9.2 R10.2 R13.1 R22.2 | length 1062.6
  Top Layer w21.65: IC4.3 v4(2525,470)
  Top Layer w39.37: J1.1 200,680 R10.2 475,615 R13.1 470,630 R13.1@455,615 ; R22.2 1367.6,267.6 v1(1400,300) R6.2 ; R9.2 2372.95,345 2395,367.05 v1(2395,390)
  Bottom Layer w21.65: v1(2395,390) 2456.96,390 2525,458.04 v4(2525,470)
CURRENT: IC6.3 J1.2 R13.2 | length 498.6
  Top Layer w39.37: J1.2 195,485 465,485 R13.2 475,485 IC6.3
EOC: IC4.6 IC5.11 R7.2 | length 1013.5
  Top Layer w15.75: IC5.11 2470,1130 2550,1050 2550,530 2610,470 IC4.6 2768.7,470 R7.2
GND: Q1.1 SW2.1 | length 148.5
  Top Layer w21.65: Q1.1 1520.79,964.21 1535,950 SW2.1
INPUT: R4.1 U2.1 | length 369.3
  Top Layer w15.75: U2.1 1195,435 1225,465 1225,661 1245,681 R4.1
LCD_D0: IC5.21 LCD1.7 | length 1360.8
  Top Layer w21.65: LCD1.7 2260,2220 2285,2195 3054.94,2195 3370,1879.94 IC5.21
LCD_D1: IC5.22 LCD1.8 | length 1357.9
  Top Layer w21.65: LCD1.8 2160,2210 2220,2150 2985,2150 IC5.22
LCD_D2: IC5.23 LCD1.9 | length 1369.6
  Top Layer w21.65: LCD1.9 2060,2190 2140,2110 2925,2110 IC5.23
LCD_D3: IC5.24 LCD1.10 | length 1413.6
  Top Layer w21.65: LCD1.10 1960,2115 2003.35,2071.65 2863.35,2071.65 IC5.24
LCD_D4: IC5.25 LCD1.11 | length 1413.6
  Top Layer w21.65: LCD1.11 1860,2115 1935,2040 2795,2040 IC5.25
LCD_D5: IC5.26 LCD1.12 | length 1442.8
  Top Layer w21.65: LCD1.12 1760,2065 1820,2005 2730,2005 IC5.26
LCD_D6: IC5.27 LCD1.13 | length 1445.8
  Top Layer w21.65: LCD1.13 1660,2060 1748.35,1971.65 2663.35,1971.65 IC5.27
LCD_D7: IC5.28 LCD1.14 | length 1428.2
  Top Layer w21.65: LCD1.14 1560,2090 1710,1940 2595,1940 IC5.28
LCD_EN: IC5.3 LCD1.6 | length 1487.4
  Bottom Layer w15.75: IC5.3 1670,1530 1917.87,1777.87 1917.87,2016.57 2041.3,2140 2300,2140 2360,2200 LCD1.6
LCD_R/W\: IC5.4 LCD1.5 | length 1494
  Bottom Layer w15.75: IC5.4 1770,1495 2017.87,1742.87 2017.87,1982.87 2095,2060 2365,2060 2460,2155 LCD1.5
LCD_RS: IC5.5 LCD1.4 | length 1499.8
  Bottom Layer w15.75: IC5.5 1870,1405 2122.13,1657.13 2122.13,1932.13 2195,2005 2475,2005 2550,2080 2550,2305 LCD1.4
MODE: IC5.15 Q1.3 R12.1 | length 1613.1
  Top Layer w19.68: 1825,1075 1920,1170 1920,1365 1975,1420 2785,1420 2870,1335 IC5.15
  Top Layer w21.65: Q1.3 R12.1 1825,1075
MODE_OUT: IC5.16 U2.6 | length 4073.4
  Top Layer w15.75: v2(902.4,531.3) 906.1,535 U2.6 ; v2(1260,180) 3110,180 3395,465 3395,617.05 3242.05,770 3020,770 2970,820 IC5.16
  Bottom Layer w15.75: v2(902.4,531.3) 902.4,267.6 990,180 v2(1260,180)
NetBT1_2: BT1.2 C7.2 R3.2 | length 265.3
  Top Layer w21.65: C7.2 2779.95,895.59 R3.2 2782,833 2808.35,806.65 BT1.2
NetC12_2: C12.2 IC5.18 X1.2 | length 306.9
  Top Layer w19.68: X1.2 3156.5,1036.5 C12.2 3156.5,1251.5 IC5.18
NetC18_2: C18.2 IC5.19 X1.1 | length 295.7
  Top Layer w19.68: IC5.19 3270,1136.5 C18.2 3268.5,1021.5 X1.1
NetIC1_2: IC1.2 R6.1 | length 284.1
  Top Layer w15.75: R6.1 1265,355 1255,365 1255,520 1270,535 IC1.2
NetIC1_3: IC1.3 R1.1 R4.2 | length 314.6
  Top Layer w15.75: IC1.3 1365,485 1395,515 R4.2 R1.1
NetIC3_3: IC3.3 R9.1 | length 220.5
  Top Layer w15.75: IC3.3 2193.7,470 2243.43,420.28 R9.1
NetIC6_2: IC6.2 R5.1 R10.1 | length 253.3
  Top Layer w15.75: IC6.2 575,535 565,545 R10.1 566,681 R5.1
NetIC6_6: IC6.6 R5.2 U2.8 | length 456.3
  Top Layer w15.75: R5.2 715,515 745,485 IC6.6 885,485 895,475 895,450 910,435 U2.8
NetLCD1_3: LCD1.3 VR1.2 | length 1006.3
  Top Layer w21.65: LCD1.3 2660,2420 2705,2465 3155.35,2465 3235,2385.35 3235,2219.65 3244.65,2210 VR1.2
NetLCD1_15: LCD1.15 R2.2 | length 185.8
  Bottom Layer w21.65: LCD1.15 1460,2136.3 R2.2
NetQ1_2: Q1.2 R11.2 | length 63.2
  Top Layer w21.65: R11.2 Q1.2@1513.19,1110
NetR11_1: R11.1 SW2.2 | length 131.2
  Top Layer w21.65: SW2.2 1435,943.54 1450,958.54 R11.1
P1.5: C19.1 IC5.6 | length 2019.8
  Top Layer w15.75: IC5.6 1970,1295 2060,1385 2580,1385 2620,1345 2620,840 2765,695 3150,695 C19.1
P1.6: C19.5 IC5.7 | length 1448.5
  Top Layer w15.75: IC5.7 2070,1325 2095,1350 2467.7,1350 2517.87,1299.83 2517.87,1197.13 2590,1125 2590,825 2855,560 C19.5
P1.7: C19.4 IC5.8 | length 1136.3
  Bottom Layer w15.75: IC5.8 2475,960 2635,960 2985,610 C19.4
PGND: C1.2 C2.2 C3.1 C4.2 C5.2 C6.1 C7.1 C8.2 C10.2 C11.2 C12.1 C13.2 C14.2 C15.2 C16.2 C17.2 C18.1 C19.6 C19.7 C19.8 C19.9 C20.2 C21.2 C22.2 IC1.4 IC2.7 IC4.4 IC5.20 IC6.4 J4.2 LCD1.1 LCD1.16 Q.2 R22.1 U1.3 U2.3 U.3 VR1.3 | length 5052.7
  Top Layer w21.65: v1(1140,110) 1140,214.57 1140.43,215 ; R22.1 1140.43,215 ; IC1.4 v3(1395,435) 1460.55,435 1480,415.55 1480,265.32 1429.68,215 1140.43,215 ; v1(1675.91,640.91) C14.2 ; U1.3 v1(1819.05,482.99) ; v1(1817.95,649.05) C10.2 ; v1(1947.95,647.95) C20.2 ; v1(2057.05,897.05) C8.2 ; C17.2 2175.73,309.27 2200,285 2405,285 2463.78,343.78 IC4.4 2430,420 2400,450 2402.4,452.4 v1(2402.4,458.7) ; C15.2 v1(2435,660) ; v1(2490,730) IC2.7 ; C16.2 v1(2700,635) ; C7.1 v1(2724.05,1034.05) ; v1(3030,1135) C12.1 ; C18.1 3350,1135 3370,1155 IC5.20
  Top Layer w31.5: v1(535,435) IC6.4 ; v1(837.95,637.05) C11.2 837.95,757.95 890,810 981.65,810 992.95,798.7 C21.2 994.39,685 C22.2 1077.05,552.95 1095,535 U2.3
  Top Layer w47.24: J4.2 505,1245 505,1133.9 C4.2 ; C1.2 C4.2 ; Q.2 900,1530 1006.17,1636.17 C2.2 ; C5.2 1135.88,1195 U.3 705,1195 638.9,1128.9 C4.2
  Bottom Layer w31.5: v1(535,435) 635.91,435 v1(837.95,637.05)
PIN1: C9.1 IC2.1 IC3.2 R8.1 | length 407.3
  Top Layer w15.75: R8.1 C9.1 ; IC3.2 2160,520 2187.05,547.05 C9.1 ; IC2.1 2190,662.95 C9.1
PIN2: C9.2 IC2.2 IC3.6 IC4.2 | length 570.5
  Top Layer w15.75: IC2.2 2240,662.95 C9.2 2242.95,482.05 2255,470 IC3.6 2366.38,470 2366.38,472.63 2413.75,520 IC4.2
RESET: BT1.1 C19.3 IC5.9 | length 1692
  Top Layer w15.75: BT1.1 2890.17,1070.26 v3(2890.17,980)
  Bottom Layer w15.75: IC5.9 2530,1005 2655,1005 C19.3@3085,575 ; v3(2890.17,980) 3085,785.17 C19.3@3085,575 ; C19.3 C19.3@3085,575
SELECT: IC5.14 U1.6 | length 2008.1
  Top Layer w15.75: v2(1892.05,275) 1892.05,467.05 1907.99,482.99 U1.6 ; v2(2655,875) 2655,1065 2770,1180 IC5.14
  Bottom Layer w15.75: v2(1892.05,275) 2550,275 2655,380 v2(2655,875)
SOC: IC2.13 IC5.10 | length 302.1
  Top Layer w21.65: IC2.13 2240,1063.9 2370,1193.9 IC5.10
TO_ADC: R8.2 U1.1 | length 574
  Top Layer w15.75: U1.1 1820,582.99 1855,617.99 1855,780 1870,795 2010,795 2043.39,761.61 R8.2
VIN: IC1.6 R1.2 U1.2 | length 857.5
  Top Layer w15.75: R1.2 1485,621 1485,500 1500,485 IC1.6 1575,485 1682.5,377.5 1842.5,377.5 1855,390 1855,525 1847.01,532.99 U1.2
VOLTAGE: J1.3 U2.2 | length 1145.6
  Top Layer w31.5: J1.3 237,243.5 875.84,243.5 1117.33,485 U2.2
pads on no net: C19.2 IC1.1 IC1.5 IC1.8 IC2.3 IC2.4 IC2.5 IC2.6 IC2.8 IC2.9 IC2.10 IC2.11 IC2.12 IC3.1 IC3.5 IC3.8 IC4.1 IC4.5 IC4.8 IC5.1 IC5.2 IC5.12 IC5.13 IC5.17 IC5.29 IC5.30 IC5.31 IC5.32 IC5.33 IC5.34 IC5.35 IC5.36 IC5.37 IC5.38 IC5.39 IC6.1 IC6.5 IC6.8 LCD1.

## Polygon pours and split planes (outlines as drawn)
PGND on Bottom Layer "Bottom Layer-PGND" (solid, remove dead copper, pour order 8): 0,2550 0,2545 0,20 3450,20 3450,45 3450,2550
AGND on Bottom Layer "Bottom Layer-AGND" (solid, remove dead copper, pour order 6): 50,820 50,640 105,585 525,585 970,140 2320,140 2495,315 2495,420 1810,420 1410,820
no net on Bottom Layer "Bottom Layer-No Net" (solid, pour order 4): 50,820
no net on Bottom Layer "Bottom Layer-No Net 1" (solid, pour order 0): 60,840
PGND on Top Layer "Top Layer-PGND" (solid, remove dead copper, pour order 12): 0,665 3425,665 3425,685 3425,2505 0,2505
no net on Top Layer "Top Layer-No Net" (solid, pour order 10): 25,2435

## Keep-outs
Keep-Out Layer:
  lines w11.81: 0,0 868.75,0 2606.25,0 3475,0 3475,2550 0,2550 0,0

## Silkscreen, mask and mechanical layers (free items; w line width, h text height)
Top Overlay:
  lines w11.81: 2975,640 3035,640 3040,645 3040,675 3125,675 3125,645 3130,640 3191.93,640
  text "I" at 1295,825 h47.24 r270
  text "V" at 1525,820 h47.24 r270
  text "I" at 350,510 h47.24
  text "V" at 350,300 h47.24
Bottom Overlay:
  text "Midterm Project" at 470,1640 h47.24 r90

## Text inside footprints (layer, text, board x,y; h text height)
C1: Top Overlay "+" at 454.88,1473.13 h47.24 r90
C2: Top Overlay "+" at 1225.12,1510.19 h47.24 r270
C4: Top Overlay "+" at 565.12,1002.91 h47.24 r270
C5: Top Overlay "+" at 1232.17,1110.19 h47.24 r270